# Altium PCB BSc_PCB_teikning.PcbDoc
Units mil, origin at the board's own origin, x right, y up, seen from the top; angles counter-clockwise.
Board outline 3150.59 x 3350.1 mil, 2 copper layers (Top Layer, Bottom Layer); 56 components, 51 nets, 244 pads, 90 vias.
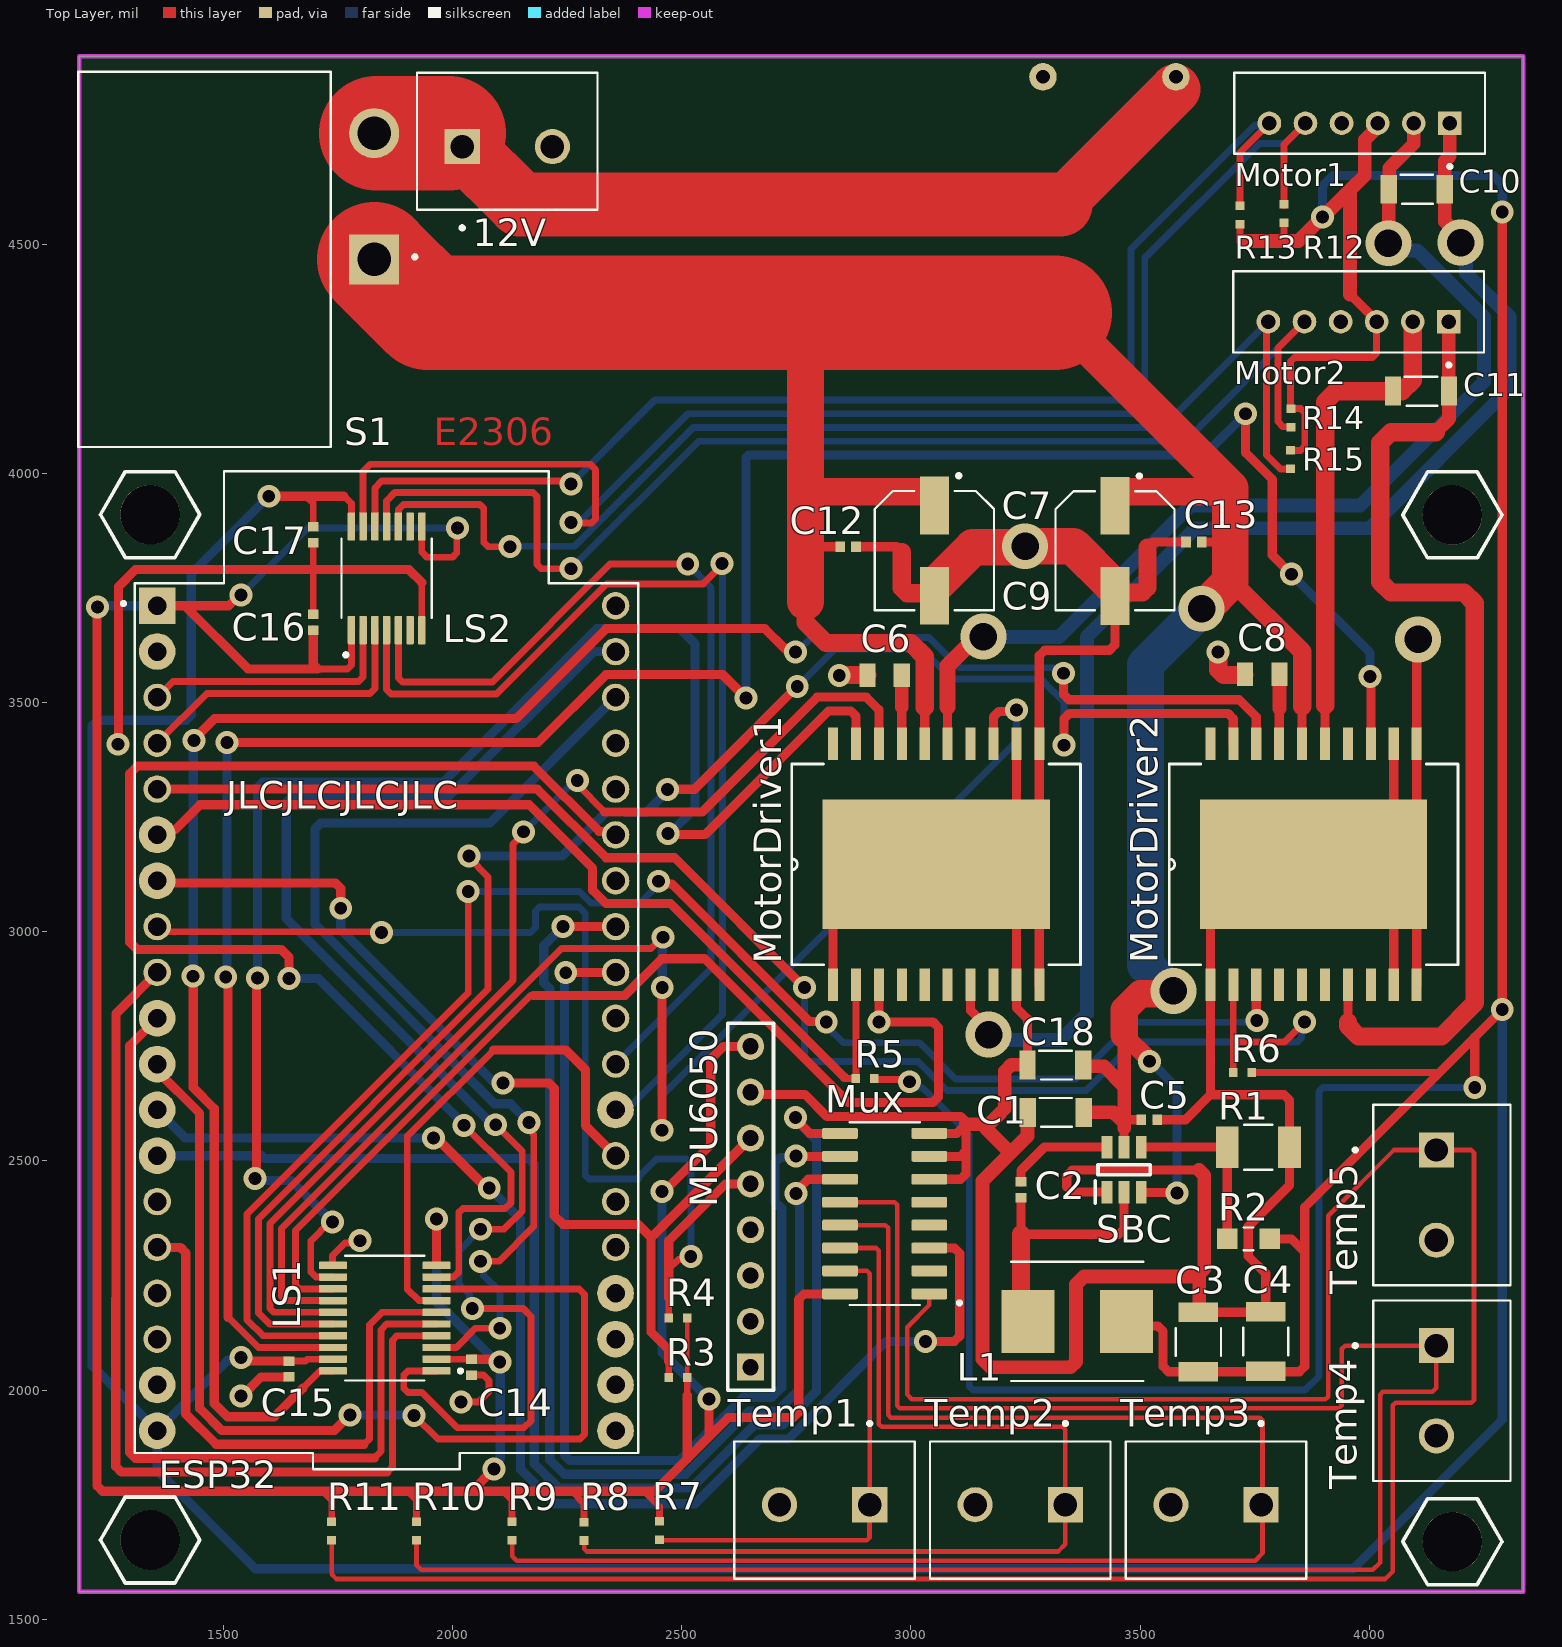
[diagram p0: Top Layer view]
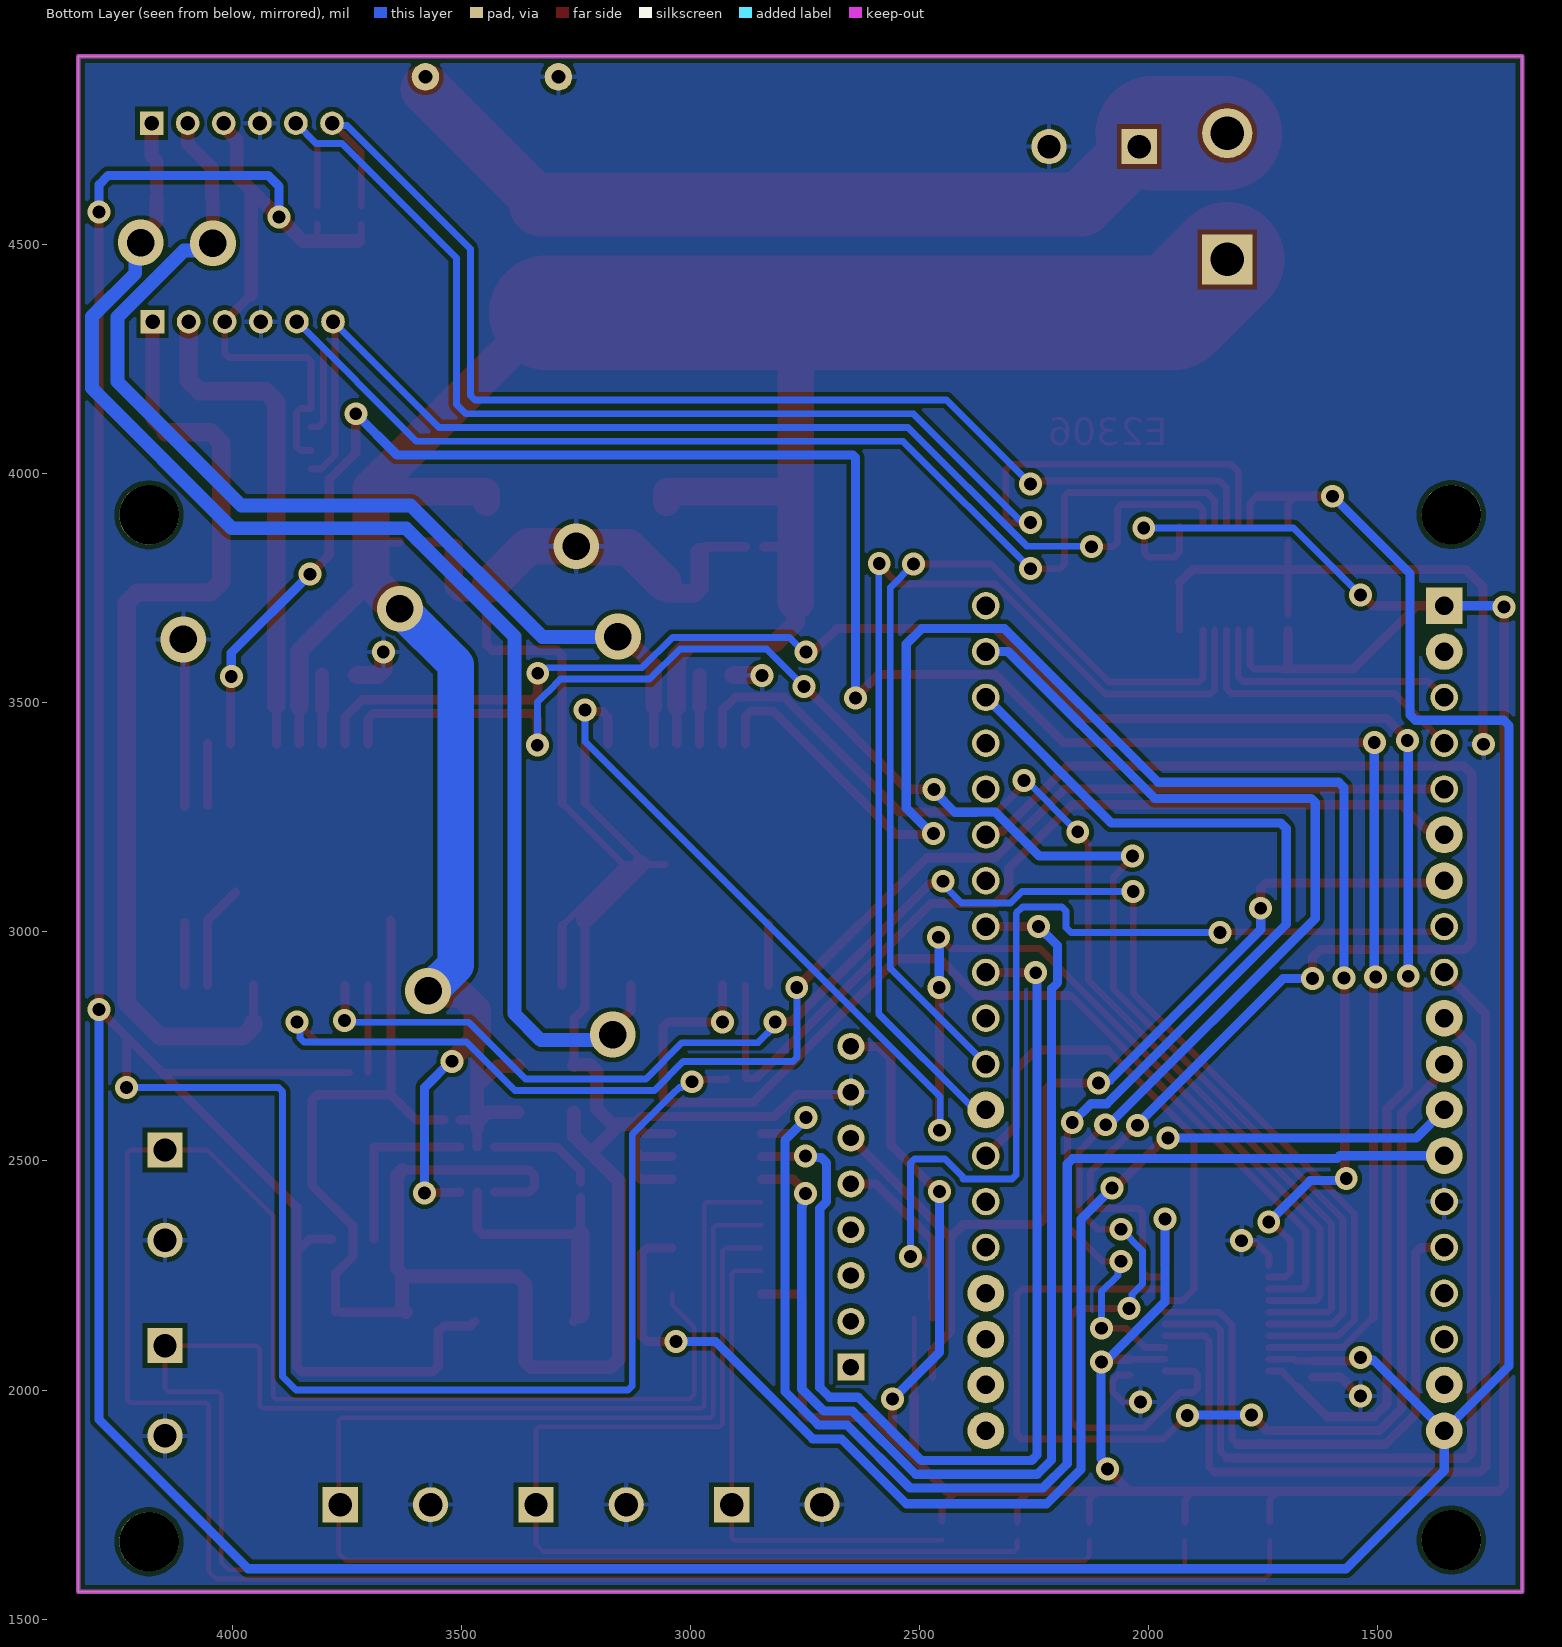
[diagram p1: Bottom Layer view, seen from below]
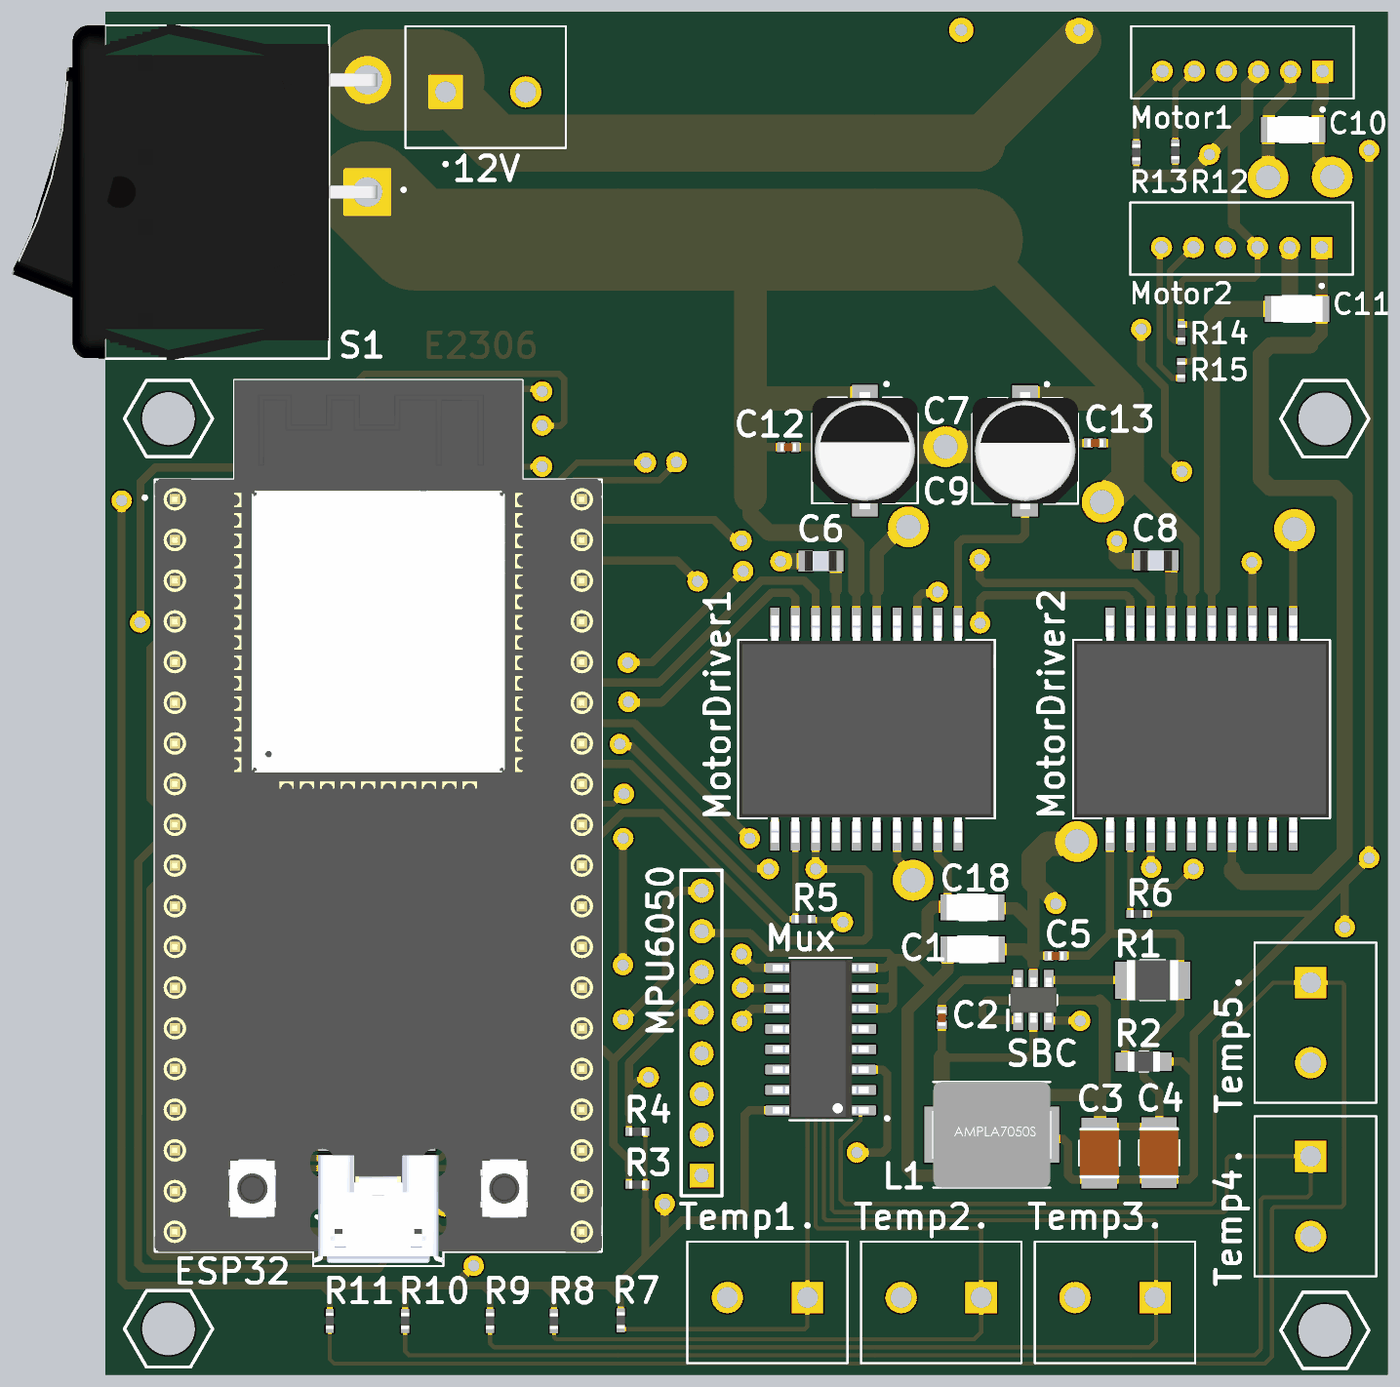
[diagram p2: 3D render of the assembled board from above, using the file's embedded part models]

## Layer stack, top to bottom
Top Solder: solder mask 0.4, Solder Resist, Dk 3.5
Top Layer: signal copper 1.4
Dielectric 1: dielectric 12.6, FR-4, Dk 4.8
Bottom Layer: signal copper 1.4
Bottom Solder: solder mask 0.4, Solder Resist, Dk 3.5

## Board outline
1185.04,1560 1185.04,4910 3570,4910 3569.16,4910.1 4335.63,4910.1 4335.63,1560.04 4335.59,1560

## Design rules (kind name [scope] priority, off if disabled: settings)
Clearance [All] p1: gap=10 ignorepadtopadclearanceinfootprint=FALSE except(0: Arc-Hole Track-Hole SMDPad-Hole THPad-Hole Via-Hole Fill-Hole Poly-Hole Region-Hole Text-Hole)
PolygonConnect [All] p1: connectstyle=Relief reliefconductorwidth=10 reliefentries=4 polygonreliefangle="90 Angle" airgapwidth=10
RoutingVias [All] p1: holewidth=28 width=50 viastyle="Through Hole" minholewidth=28 minwidth=50 maxholewidth=80 maxwidth=100
SolderMaskExpansion [All] p1: expansion=4 istentingtop=FALSE
Width [All] p1: maxlimit=500 minlimit=10 preferedwidth=10 minimp=50.000000 maximp=50.000000 favimp=50.000000
30 further rules are at their usual default settings.

## Classes and differential pairs
component class BSc_skjemateikning: 12V C1 C2 C3 C4 C5 C6 C7 C8 C9 C10 C11 C12 C13 C14 C15 C16 C17 C18 ESP32 L1 LS1 LS2 Motor1 Motor2 MotorDriver1 MotorDriver2 MPU6050 Mux R1 R2 R3 R4 R5 R6 R7 R8 R9 R10 R11 R12 R13 R14 R15 S1 SBC Temp1 Temp2 Temp3 Temp4 Temp5

## Components (designator, comment, footprint, x,y, rotation, side; value= is the part's Value field where it differs from the comment)
12V "TB002-500-02BE" CUI_TB002-500-02BE 2020.87,4712.83 r0 top
C1 "885012208094" WCAP-CSGP_885012208094 3316,2606 r0 top
C2 "CGA2B3X7R1E104K050BB" CAPC1005X55N 3240,2437.2 r270 top
C3 "CGA6P3X7R1E226M250AE" CAP_CGA6P3X7R1E226M250AE 3627,2105 r270 top
C4 "CGA6P3X7R1E226M250AE" CAP_CGA6P3X7R1E226M250AE 3774,2106 r270 top
C5 "CGA2B3X7R1E104K050BB" CAPC1005X55N 3520,2590 r0 top
C6 "885012207125" WCAP-CSGP_885012207125 2942.6,3560 r0 top
C7 "EEETQV470XAP" CAP_EEETQV470XAP 3051,3831.42 r270 top
C8 "885012207125" WCAP-CSGP_885012207125 3766.38,3561.52 r0 top
C9 "EEETQV470XAP" CAP_EEETQV470XAP 3445,3831 r270 top
C10 "885012208069" WCAP-CSGP_885012208069 4103.35,4619.87 r0 top
C11 "885012208069" WCAP-CSGP_885012208069 4112.66,4179.29 r0 top
C12 "CGA2B3X7R1E104K050BB" CAPC1005X55N 2862.8,3840 r0 top
C13 "CGA2B3X7R1E104K050BB" CAPC1005X55N 3617.21,3850 r180 top
C14 "CGA2B3X7R1E104K050BB" CAPC1005X55N 2041,2050 r270 top
C15 "CGA2B3X7R1E104K050BB" CAPC1005X55N 1643,2046 r270 top
C16 "CGA2B3X7R1E104K050BB" CAPC1005X55N 1696,3675 r90 top
C17 "CGA2B3X7R1E104K050BB" CAPC1005X55N 1696,3866 r270 top
C18 "885012208094" WCAP-CSGP_885012208094 3315,2709 r0 top
ESP32 "ESP32-DEVKITC" MODULE_ESP32-DEVKITC 1855.51,2811.65 r0 top
J1 "15TSP105" SAMTEC_SO-0715-02-01-01-L 1340,3910 r0 top
J2 "15TSP105" SAMTEC_SO-0715-02-01-01-L 4181.1,3909.45 r0 top
J3 "15TSP105" SAMTEC_SO-0715-02-01-01-L 4181.1,1669.29 r180 top
J4 "15TSP105" SAMTEC_SO-0715-02-01-01-L 1340,1673 r0 top
L1 "AMPLA7050S-100MT" IND_AMPLA7050S-100MT 3362.72,2150 r0 top
LS1 "TXS0108EPWR" SOP65P640X120-20N 1852,2157 r180 top
LS2 "TXS0104EPWRG4" SOP65P640X120-14N 1856,3771 r90 top
Motor1 "" JST_B6B-PH-K-S(LF)(SN) 3978.71,4785.56 r0 top
Motor2 "" JST_B6B-PH-K-S(LF)(SN) 3976.58,4352.48 r0 top
MotorDriver1 "MC33886PVW" SOIC127P1420X340-21N 3055,3147 r90 top
MotorDriver2 "MC33886PVW" SOIC127P1420X340-21N 3878.25,3147 r90 top
MPU6050 "" HDR1X8 2650,2050 r90 top
Mux "SN74LV4051ADR" SOIC127P600X175-16N 2942.56,2385 r180 top
R1 "ERJ14NF1372U" RES_ERJ14NF1372U 3757.91,2530 r180 top
R2 "ERJP06D1003V" RES_ERJP06D1003V 3736.26,2330 r180 top
R3 "ERJ2RKF1002X" RES_ERJ2RKF1002X 2491.65,2027.56 r0 top
R4 "ERJ2RKF1002X" RES_ERJ2RKF1002X 2491.65,2157.48 r0 top
R5 "ERJ2RKF1002X" RES_ERJ2RKF1002X 2899.84,2680 r180 top
R6 "ERJ2RKF1002X" RES_ERJ2RKF1002X 3723.3,2693.03 r0 top
R7 "ERJ2RKF1002X" RES_ERJ2RKF1002X 2451,1694 r90 top
R8 "ERJ2RKF1002X" RES_ERJ2RKF1002X 2287,1692 r270 top
R9 "ERJ2RKF1002X" RES_ERJ2RKF1002X 2129.92,1692.44 r270 top
R10 "ERJ2RKF1002X" RES_ERJ2RKF1002X 1921.26,1692.44 r270 top
R11 "ERJ2RKF1002X" RES_ERJ2RKF1002X 1736.22,1692.91 r270 top
R12 "ERJ2RKF1002X" RES_ERJ2RKF1002X 3814,4567 r90 top
R13 "ERJ2RKF1002X" RES_ERJ2RKF1002X 3718,4564 r90 top
R14 "ERJ2RKF1002X" RES_ERJ2RKF1002X 3829,4121 r270 top
R15 "ERJ2RKF1002X" RES_ERJ2RKF1002X 3828,4030 r270 top
S1 "R1966ABLKBLKGR" SW_R1966ABLKBLKGR 1828.86,4466.77 r270 top
SBC "LMR51420XDDCR" SOT95P280X110-6N 3465.07,2481.08 r90 top
Temp1 "TB002-500-02BE" CUI_TB002-500-02BE 2910,1750 r180 top
Temp2 "TB002-500-02BE" CUI_TB002-500-02BE 3336.85,1750 r180 top
Temp3 "TB002-500-02BE" CUI_TB002-500-02BE 3763.85,1750 r180 top
Temp4 "TB002-500-02BE" CUI_TB002-500-02BE 4146.29,2097.02 r270 top
Temp5 "TB002-500-02BE" CUI_TB002-500-02BE 4146.29,2523.84 r270 top
? "USB Li-ion batterilader" "USB Li-ion batterilader" 3578,4865 r180 top

## Footprints (in the part's own frame and the unit in brackets; to place one, negate y for a bottom-side part, rotate by r counter-clockwise, add the part's x,y. Pads: shape width x height; smd on the part's side, far side on the other; paste and mask are expansions set on the pad)
CAP_CGA6P3X7R1E226M250AE [mm]
  rect 1.1x2.2 smd: 1(-1.65,0) 2(1.65,0)
  silkscreen extent -0.78,-1.25 0.78,1.25, body extent -1.6,-1.25 1.6,1.25, height 2.8
CAP_EEETQV470XAP [mm]
  rect 3.2x1.6 smd: 1(-2.5,0) 2(2.5,0)
  silkscreen extent -4.25,-3.3 3.3,3.3, body extent -3.65,-3.3 3.65,3.3, height 7.7
CAPC1005X55N [mm]
  rect 0.53x0.6 smd: 1(-0.437,0) 2(0.437,0)
  body extent -0.5,-0.25 0.5,0.25, height 0.55
CUI_TB002-500-02BE [mm]
  rect 1.95x1.95 hole 1.3: 1(0,0)
  round 1.95 hole 1.3: 2(5,0)
  silkscreen extent -2.5,-4.6 7.5,4.1
HDR1X8 [mm] "Connector; Header; 8 Position"
  rect 1.5x1.5 hole 0.9: 1(0,0)
  round 1.5 hole 0.9: 2(2.54,0) 3(5.08,0) 4(7.62,0) 5(10.16,0) 6(12.7,0) 7(15.24,0) 8(17.78,0)
  silkscreen extent -1.27,-1.27 19.05,1.27
IND_AMPLA7050S-100MT [mm]
  rect 2.95x3.5 smd: 1(-2.725,0) 2(2.725,0)
  silkscreen extent -3.65,-3.3 3.65,3.3, body extent -3.72,-3.3 3.72,3.3, height 4.8
JST_B6B-PH-K-S(LF)(SN) [mm]
  rect 1.308x1.308 hole 0.8: 1(5,-0.55)
  round 1.308 hole 0.8: 2(3,-0.55) 3(1,-0.55) 4(-1,-0.55) 5(-3,-0.55) 6(-5,-0.55)
  silkscreen extent -6.95,-3.05 6.95,2.25
MODULE_ESP32-DEVKITC [mil]
  rect 80x80 hole 40.16: 1(-500,899.61)
  round 80 hole 40.16: 2(-500,799.61) 6(-500,399.61) 7(-500,299.61) 10(-500,-0.39) 11(-500,-100.39) 12(-500,-200.39) 13(-500,-300.39) 18(-500,-800.39) 19(-500,-900.39) 20(500,-900.39) 21(500,-800.39) 22(500,-700.39) 23(500,-600.39) 27(500,-200.39)
  round 60 hole 40.16: 3(-500,699.61) 4(-500,599.61) 5(-500,499.61) 8(-500,199.61) 9(-500,99.61) 14(-500,-400.39) 15(-500,-500.39) 16(-500,-600.39) 17(-500,-700.39) 24(500,-500.39) 25(500,-400.39) 26(500,-300.39) 28(500,-100.39) 29(500,-0.39) 30(500,99.61) 31(500,199.61) 32(500,299.61) 33(500,399.61) 34(500,499.61) 35(500,599.61) 36(500,699.61) 37(500,799.61) 38(500,899.61)
  silkscreen extent -578,-984 549,1193, body extent -550,-976 550,1193, height 228
RES_ERJ2RKF1002X [mm]
  rect 0.475x0.5 smd: 1(-0.512,0) 2(0.512,0)
  body extent -0.5,-0.25 0.5,0.25, height 0.35
RES_ERJ14NF1372U [mm]
  rect 1.25x2.3 smd: 1(-1.725,0) 2(1.725,0)
  silkscreen extent -0.78,-1.25 0.78,1.25, body extent -1.6,-1.25 1.6,1.25, height 0.6
RES_ERJP06D1003V [mm]
  rect 1.15x1.15 smd: 1(-1.175,0) 2(1.175,0)
  silkscreen extent -0.28,-0.62 0.28,0.62, body extent -1,-0.63 1,0.63, height 0.6
SAMTEC_SO-0715-02-01-01-L [mm]
  round 3.3 hole 3.3 unplated: ""(0,0)
  silkscreen extent -2.75,-2.38 2.75,2.38
SOIC127P600X175-16N [mm]
  rrect25% 1.97x0.6 smd: 1(-2.475,4.445) 2(-2.475,3.175) 3(-2.475,1.905) 4(-2.475,0.635) 5(-2.475,-0.635) 6(-2.475,-1.905) 7(-2.475,-3.175) 8(-2.475,-4.445) 9(2.475,-4.445) 10(2.475,-3.175) 11(2.475,-1.905) 12(2.475,-0.635) 13(2.475,0.635) 14(2.475,1.905) 15(2.475,3.175) 16(2.475,4.445)
  silkscreen extent -4.25,-5.07 1.95,5.07, body extent -3,-4.95 3,4.95, height 1.75
SOIC127P1420X340-21N [mil]
  rect 71x22 smd: 1(-263,225) 2(-263,175) 3(-263,125) 4(-263,75) 5(-263,25) 6(-263,-25) 7(-263,-75) 8(-263,-125) 9(-263,-175) 10(-263,-225) 11(263,-225) 12(263,-175) 13(263,-125) 14(263,-75) 15(263,-25) 16(263,25) 17(263,75) 18(263,125) 19(263,175) 20(263,225)
  rect 283x496 smd: 21(0,0)
  silkscreen extent -219,-315 219,315, body extent -280,-313 280,313, height 134
SOP65P640X120-14N [mm]
  rrect25% 1.57x0.41 smd: 1(-2.87,1.95) 2(-2.87,1.3) 3(-2.87,0.65) 4(-2.87,0) 5(-2.87,-0.65) 6(-2.87,-1.3) 7(-2.87,-1.95) 8(2.87,-1.95) 9(2.87,-1.3) 10(2.87,-0.65) 11(2.87,0) 12(2.87,0.65) 13(2.87,1.3) 14(2.87,1.95)
  silkscreen extent -4.34,-2.5 2.2,2.5, body extent -3.2,-2.5 3.2,2.5, height 1.2
SOP65P640X120-20N [mm]
  rrect25% 1.57x0.41 smd: 1(-2.87,2.925) 2(-2.87,2.275) 3(-2.87,1.625) 4(-2.87,0.975) 5(-2.87,0.325) 6(-2.87,-0.325) 7(-2.87,-0.975) 8(-2.87,-1.625) 9(-2.87,-2.275) 10(-2.87,-2.925) 11(2.87,-2.925) 12(2.87,-2.275) 13(2.87,-1.625) 14(2.87,-0.975) 15(2.87,-0.325) 16(2.87,0.325) 17(2.87,0.975) 18(2.87,1.625) 19(2.87,2.275) 20(2.87,2.925)
  silkscreen extent -4.29,-3.45 2.2,3.45, body extent -3.2,-3.25 3.2,3.25, height 1.2
SOT95P280X110-6N [mm]
  rect 1.25x0.6 smd: 1(-1.25,0.95) 2(-1.25,0) 3(-1.25,-0.95) 4(1.25,-0.95) 5(1.25,0) 6(1.25,0.95)
  silkscreen extent -1.88,-1.45 0.28,1.6, body extent -1.4,-1.45 1.4,1.45, height 0.97
SW_R1966ABLKBLKGR [mm]
  rect 2.775x2.775 hole 1.85: 1(0,0)
  round 2.775 hole 1.85: 1A(-7,0)
  silkscreen extent -10.4,-16.4 10.4,2.35, body extent -10.47,-22.2 10.47,0.6, height 14.8
"USB Li-ion batterilader" [mil]
  round 60 hole 30: 1(0,0) 2(290,0)
  body extent -100,-40 1235,810, height 197
WCAP-CSGP_885012207125 [mm]
  rect 0.9x1.3 smd: 1(-0.95,0) 2(0.95,0)
  body extent -1,-0.63 1,0.63, height 0.63
WCAP-CSGP_885012208069 [mm]
  rect 0.9x1.6 smd: 1(-1.55,0) 2(1.55,0)
  silkscreen extent -0.9,-0.8 0.9,0.8, body extent -1.6,-0.8 1.6,0.8, height 1.25
WCAP-CSGP_885012208094 [mm]
  rect 0.9x1.6 smd: 1(-1.55,0) 2(1.55,0)
  silkscreen extent -0.9,-0.8 0.9,0.8, body extent -1.6,-0.8 1.6,0.8, height 1.25

## Part data
12V C3 C4 C7 C9 ESP32 L1 LS1 LS2 Mux R1 R2 R3 R4 R5 R6 R7 R8 R9 R10 R11 R12 R13 R14 R15 S1 Temp1 Temp2 Temp3 Temp4 Temp5: Package=None, Availability=Unavailable, Price=None
  12V Temp1 Temp2 Temp3 Temp4 Temp5: MF="{'manufacturer': u'CUI Devices'}", MP=TB002-500-02BE
  C3 C4: MF="{'manufacturer': u'TDK Corporation'}", MP=CGA6P3X7R1E226M250AE
  C7 C9: MF="{'manufacturer': u'Panasonic'}", MP=EEETQV470XAP
  ESP32: MF="{'manufacturer': u'Olimex LTD'}", MP=ESP32-DEVKITC
  L1: MF="{'manufacturer': u'Abracon Corporation'}", MP=AMPLA7050S-100MT
  LS1: MF="{'manufacturer': u'Texas Instruments'}", MP=TXS0108EPWR
  LS2: MF="{'manufacturer': u'Texas Instruments'}", MP=TXS0104EPWRG4
  Mux: MF="{'manufacturer': u'Texas Instruments'}", MP=SN74LV4051ADR
  R1: MF="{'manufacturer': u'Panasonic'}", MP=ERJ14NF1372U
  R2: MF="{'manufacturer': u'Panasonic'}", MP=ERJP06D1003V
  R3 R4 R5 R6 R7 R8 R9 R10 R11 R12 R13 R14 R15: MF="{'manufacturer': u'Panasonic'}", MP=ERJ2RKF1002X
  S1: MF="{'manufacturer': u'E-Switch'}", MP=R1966ABLKBLKGR
C1 C10 C11 C18: "<b> WCAP-CSGP Ceramic Capacitors <br> <br> <br><b>Characteristics </b><br> </b><br>Multilayer Ceramic Chip Capacitor <br>Recommended soldering:Reflow, for 0603 and 0805 wave soldering is also allowed <br>Operating temperature:-55 Â°C to +125 Â°C; <br>Ceramic characteristics: Class I - NPO ; Class II -X7R, X5R <br>High performance ceramic <br>High capacitance stability <br>Minimal aging  <br>Termination:Cu/Ni/Sn <br>   <br><a href=\"http://katalog.we-online.de/media/images/eisos/WCAP-CSGP_pf2.jpg\" title=\"Enlarge picture\"> <img src=\"http://katalog.we-online.de/media/thumbs2/eisos/thb_WCAP-CSGP_pf2.jpg\" width=\"320\"></a><p> Details see: <a href=\"http://katalog.we-online.de/en/pbs/WCAP-CSGP-1206?\">http://katalog.we-online.de/en/pbs/WCAP-CSGP-1206? </a><p>Created:  2015-01-28 <br>2015 (C) Wurth Elektronik", Package=None, Availability=Unavailable, MF="{'manufacturer': u'Wurth Electronics Inc'}", Price=None
  C1 C18: MP=885012208094
  C10 C11: MP=885012208069
C2 C5 C12 C13 C14 C15 C16 C17: "0.1 ÂµF Â±10% 25V Ceramic Capacitor X7R 0402 (1005 Metric)", Package=None, Availability=Unavailable, MF="{'manufacturer': u'TDK Electronics'}", MP=CGA2B3X7R1E104K050BB, Price=None
C6 C8: "<b> WCAP-CSGP Ceramic Capacitors <br> <br> <br><b>Characteristics </b><br> </b><br>Multilayer Ceramic Chip Capacitor <br>Recommended soldering:Reflow, for 0603 and 0805 wave soldering is also allowed <br>Operating temperature:-55 Â°C to +125 Â°C; <br>Ceramic characteristics: Class I - NPO ; Class II -X7R, X5R <br>High performance ceramic <br>High capacitance stability <br>Minimal aging  <br>Termination:Cu/Ni/Sn <br>   <br><a href=\"http://katalog.we-online.de/media/images/eisos/WCAP-CSGP_pf2.jpg\" title=\"Enlarge picture\"> <img src=\"http://katalog.we-online.de/media/thumbs2/eisos/thb_WCAP-CSGP_pf2.jpg\" width=\"320\"></a><p> Details see: <a href=\"http://katalog.we-online.de/en/pbs/WCAP-CSGP-0805?\">http://katalog.we-online.de/en/pbs/WCAP-CSGP-0805? </a><p>Created:  2015-01-28 <br>2015 (C) Wurth Elektronik", Package=None, Availability=Unavailable, MF="{'manufacturer': u'Wurth Electronics Inc'}", MP=885012207125, Price=None
J1 J2 J3 J4: library part SO-0715-02-01-01-L, Package=None, Availability=Unavailable, MF="{'manufacturer': u'Samtec'}", MP=SO-0715-02-01-01-L, Price=None
Motor1 Motor2: library part B6B-PH-K-S(LF)(SN), Package=None, Availability=Unavailable, MF="{'manufacturer': u'JST'}", MP=B6B-PH-K-S(LF)(SN), Price=None
MotorDriver1 MotorDriver2: "H-Bridge", Package=None, Availability=Unavailable, MF="{'manufacturer': u'NXP USA'}", MP=MC33886PVW, Price=None
MPU6050: library part "Header 8", "Header, 8-Pin", LatestRevisionDate=17-Jul-2002, LatestRevisionNote="Re-released for DXP Platform.", Publisher="Altium Limited"
SBC: "Integrated Circuit", Manufacturer_Name="Texas Instruments", Mouser Part Number=595-LMR51420XDDCR, Arrow Part Number=LMR51420XDDCR, Arrow Price/Stock=https://www.arrow.com/en/products/lmr51420xddcr/texas-instruments?region=nac, Datasheet Link=https://www.ti.com/lit/ds/symlink/lmr51420.pdf?ts=1663231243064, Height=1.1mm, Manufacturer_Part_Number=LMR51420XDDCR, Mouser Price/Stock=https://www.mouser.co.uk/ProductDetail/Texas-Instruments/LMR51420XDDCR?qs=vvQtp7zwQdN6fBqQU4azxw%3D%3D

## Via types
v1: diameter 50, hole 28, Top Layer to Bottom Layer, 70 vias
v2: diameter 50/50 (per signal layer), hole 28, Top Layer to Bottom Layer, 12 vias
v3: diameter 100, hole 60, Top Layer to Bottom Layer, 8 vias

## Nets (pads, with @x,y where several pads share a name; then routed paths per layer and width w, separated by ;. In a path a pad name is that pad's centre, name@x,y a point inside that pad or via, vN(x,y) a via of type N, cw(c..) or ccw(c..) an arc to the next point about the centre after c; other vN are vias at no path point)
3.3V: C14.1 C16.1 ESP32.1 LS1.2 LS1.10 LS2.1 LS2.8 MPU6050.8 Mux.16 R3.2 R4.2 R7.2 R8.1 R9.1 R10.1 R11.1 | length 8131.3
  Top Layer w10: R3.2 R4.2
  Top Layer w15: 1705.79,3573.5 1770.44,3573.5 1779.23,3582.29 LS2.1 ; 1716.54,1779.53 1736.22,1759.84 R11.1 ; 1901.57,1779.53 1921.26,1759.84 R10.1 ; LS2.8 1932.77,3828.23 1944,3817 2000.21,3817 2009,3825.79 2009,3879 v1(2011,3881) ; LS1.2 2040.77,2067.43 C14.1 ; 2110.24,1779.53 2129.92,1759.84 R9.1 ; 2260,1779.53 2287,1752.53 R8.1 ; 2418,1779.53 2451,1746.53 R7.2 ; 2511.81,1988.19 R3.2
  Top Layer w20: v1(1225.04,3708.66) 1224.41,3708.03 1224.41,1791.24 1236.13,1779.53 1716.54,1779.53 1901.57,1779.53 2041.53,1779.53 ; ESP32.1@1352.91,3708.66 ESP32.1 1415.74,3711.26 ; v1(1538,3735) 1535.02,3735 1511.28,3711.26 1415.74,3711.26 ; C16.1 1696,3583.29 1705.79,3573.5 1553.5,3573.5 1415.74,3711.26 ; v1(1965,2373) 1965,2275.39 LS1.10@1965.47,2274.92 ; C14.1 2088.68,2067.2 2094.88,2061 v1(2103,2061) ; v1(2090,1828) 2041.53,1779.53 ; v1(2456.69,2433.07) 2460.63,2433.07 2562.99,2535.43 2562.99,2722.28 2590.47,2749.76 2649.76,2749.76 MPU6050.8 ; 2511.81,1988.19 2511.81,1850.39 ; v1(2559.06,1980.32) 2559.06,1897.64 ; Mux.16 2766.97,2210 2755.25,2198.28 2755.25,1951.72 2743.53,1940 2601.42,1940 2559.06,1897.64 ; 2041.53,1779.53 2110.24,1779.53 2260,1779.53 2418,1779.53 2440.94,1779.53 2511.81,1850.39 ; 2511.81,1850.39 2559.06,1897.64
  Bottom Layer w15: v1(1538,3735) 1684,3881 v1(2011,3881)
  Bottom Layer w20: v1(1225.04,3708.66) 1227.64,3711.26 ESP32.1 ; v1(1965,2373) 1965,2192.36 2096.36,2061 v1(2103,2061) ; v1(2090,1828) 2090,1836.12 2104,1850.12 v1@2104,2060 ; v1(2456.69,2433.07) 2456.69,2082.68 v1(2559.06,1980.32)
B1: LS1.20 MotorDriver2.18 | length 4390.6
  Top Layer w15: 1673,2004 1710.84,2041.84 LS1.20
  Top Layer w20: v1(1434,2903) 1434,2660.05 1480,2614.05 1480,1970.85 1508.85,1942 1611,1942 1673,2004 ; v1(1436,3417) 1436,3420.52 1480.48,3465 2138.54,3465 2334.8,3661.26 2681.06,3661.26 2726.34,3615.98 2742.29,3615.98 v1(2748.03,3610.24) ; v1(3333,3564) 3333,3517.99 3344.72,3506.27 3715.81,3506.27 3753.25,3468.82 MotorDriver2.18
  Bottom Layer w15: v1(2748.03,3610.24) 2751.68,3610.24 2783.44,3642 3039.1,3642 3105.1,3576 3311.53,3576 3323.53,3564 v1(3333,3564)
  Bottom Layer w20: v1(1434,2903) 1434,3415 v1(1436,3417)
B2: LS1.18 MotorDriver2.13 | length 5215.2
  Top Layer w15: 1510,2159.1 1576.08,2093.02 LS1.18
  Top Layer w20: v1(1505,2901) 1510,2896 1510,2159.1 ; v1(1508,3413) 2186.54,3413 2334.8,3561.26 2588.74,3561.26 v1(2640,3510) ; v2(3730,4130) 3730,4045 3788,3987 3788,3822 v2(3830,3780) ; v1(4001.61,3557.02) 4003.33,3555.29 MotorDriver2.13@4003.33,3410.08
  Bottom Layer w20: v1(1505,2901) 1508,2904 v1(1508,3413) ; v1(2640,3510) 2640,4034.14 2645.86,4040 3640,4040 v2(3730,4130) ; v2(3830,3780) 4001.61,3608.39 v1(4001.61,3557.02)
B3: LS1.17 MotorDriver2.3 | length 3404
  Top Layer w15: LS1.17 1585.85,2118.61 1551.5,2152.96 1551.5,2383.92 2034,2866.42 v1(2034,3088)
  Top Layer w20: v2(2448.82,3110.24) 2454.56,3104.5 2478.18,3104.5 2778.42,2804.26 2813.98,2804.26 v2(2815.09,2803.15) ; v2@3753.25,2807.5 MotorDriver2.3
  Bottom Layer w15: v1(2034,3088) 2277,3088 2302,3063 2409,3063 2448.82,3102.82 v2(2448.82,3110.24) ; v2(2815.09,2803.15) 2815.09,2794.91 2852.13,2757.87 3018.13,2757.87 3097,2679 3360.1,2679 3483.56,2802.46 3750.65,2802.46 v2(3754.47,2806.28)
B4: LS1.16 MotorDriver2.19 | length 3524.1
  Top Layer w15: LS1.16 1600.52,2144.2 1576.5,2168.23 1576.5,2373.56 2077.5,2874.56 2077.5,3119.6 2035.43,3161.67 v1(2035.43,3165.35)
  Top Layer w20: v1(2468.5,3310) 2469.53,3311.02 2527.8,3311.02 v1(2751.97,3535.2) ; v1@3339.74,3412.74 v1(3334,3407) 3334,3464.56 3345.72,3476.27 3691.54,3476.27 3703.25,3464.56 MotorDriver2.19
  Bottom Layer w15: v1(2751.97,3535.2) 2833.77,3617 3023,3617 3089,3551 3283.27,3551 3310.96,3523.31 3311.69,3523.31 3334,3501 v1(3334,3407)
  Bottom Layer w20: v1(2035.43,3165.35) 2238.9,3165.35 2334.8,3261.26 2376.22,3261.26 2376.78,3260.7 2422.98,3260.7 2468.5,3306.22 v1(2468.5,3310)
B5: LS1.15 MotorDriver1.18 | length 2454.5
  Top Layer w15: LS1.15 1610.29,2169.8 1601.5,2178.58 1601.5,2363.21 2132,2893.71 2132,3191.71 2155,3214.71 v1(2155,3218) ; v1(2272.06,3330.06) 2272.06,3320.94 2331.74,3261.26
  Top Layer w20: 2331.74,3261.26 2544.72,3261.26 2795.28,3511.81 2902.33,3511.81 2930,3484.14 MotorDriver1.18
  Bottom Layer w15: v1(2155,3218) 2267.06,3330.06 v1(2272.06,3330.06)
B6: LS1.14 MotorDriver1.13 | length 3136.3
  Top Layer w15: LS1.14 1635.29,2195.39 1626.5,2204.17 1626.5,2352.85 2237.41,2963.76 2432.71,2963.76 2456.95,2988 v1(2459,2988)
  Top Layer w20: v1(2456.69,2566.93) 2456.69,2878.09 v1(2457.3,2878.7) ; MotorDriver1.13 3180,3468.78 3191.72,3480.5 3226.5,3480.5 v1(3230,3484)
  Bottom Layer w10: v1@2455,2568.62 v1(2456.69,2566.93)
  Bottom Layer w15: v1@2455,2568.62 2455,2640.04 3230,3415.04 v1(3230,3484)
  Bottom Layer w20: v1(2457.3,2878.7) 2457.3,2986.3 v1(2459,2988)
B7: LS1.13 MotorDriver1.3 | length 2354.5
  Top Layer w15: LS1.13 1665.79,2220.98 1657,2229.76 1657,2347.99 2170.27,2861.26 2176.15,2861.26
  Top Layer w20: 2176.15,2861.26 2376.22,2861.26 2455.96,2941 2549.8,2941 2863.1,2627.7 3048.15,2627.7 3059.86,2639.42 3059.86,2791.42 3048.15,2803.14 v2(2930.09,2803.14) 2930.09,2883.91 MotorDriver1.3
B8: LS1.12 MotorDriver1.19 | length 3388.5
  Top Layer w15: v1(1738.23,2366.77) 1731.77,2366.77 1690.6,2325.6 1690.6,2258.02 1702.04,2246.59 LS1.12
  Top Layer w20: v1(1569.2,2461.72) 1572.46,2464.98 1572.46,2897.46 v1(1574,2899) ; v1(2470,3214) 2472,3212 2550.58,3212 2820.39,3481.81 2868.28,3481.81 2880,3470.1 MotorDriver1.19
  Bottom Layer w20: v1(1569.2,2461.72) 1573.91,2457 1648,2457 v1(1738.23,2366.77) ; v1(1574,2899) 1574,3314.28 1585.72,3326 1979.57,3326 2314.83,3661.26 2495.56,3661.26 2529,3627.82 2529,3270 2473,3214 v1(2470,3214)
D1: ESP32.37 LS1.1 | length 3062.3
  Top Layer w15: LS1.1 1902.29,2041.84 1893.5,2033.06 1893.5,2003.79 1902.29,1995 1933,1995 2010,1918 2156,1918 2171,1933 2171,2161.13 2154.13,2178 v1(2043,2178) ; v1(2061,2351) 2112,2351 2152,2391 2152,2521 v1(2094,2579)
  Bottom Layer w15: v1(2043,2178) 2036.91,2184.09 2036.91,2209.09 2014,2232 2014,2304 v1(2061,2351)
  Bottom Layer w20: v1(2094,2579) 2087,2579 1637,3029 1637,3282.21 1645.79,3291 1987,3291 2307.26,3611.26 ESP32.37
D2: ESP32.36 LS1.3 | length 2328.2
  Top Layer w15: LS1.3 2008.02,2093.02 2050,2135 v1(2103,2135) ; v1(2061,2281) 2101,2281 2177,2357 2177,2558.12 2173.7,2561.42 2173.7,2577.3 v1(2167,2584)
  Top Layer w20: ESP32.36 ESP32.36@2356.77,3510
  Bottom Layer w15: v1(2061,2281) 2067.59,2274.41 2067.59,2250.41 2103,2215 v1(2103,2135)
  Bottom Layer w20: v1(2167,2584) 2126.13,2624.87 2091.37,2624.87 1700,3016.24 1700,3225.28 1711.72,3237 2081.25,3237 ESP32.36
D3: ESP32.15 LS1.6 | length 1258.2
  Top Layer w15: 1806.79,1882 1818.5,1893.71 1818.5,2142.5 1845.8,2169.8 LS1.6
  Top Layer w20: ESP32.15 1406.28,2311.26 1418,2299.54 1418,1948 1484,1882 1806.79,1882
D4: ESP32.26 LS1.7 | length 1106.9
  Top Layer w15: LS1.7 1926.18,2195.41 1901,2220.58 1901,2553.1 2089.9,2742
  Top Layer w20: 2089.9,2742 2247,2742 2290,2699 2290,2576.77 ESP32.26
FS1: ESP32.5 MotorDriver2.2 R6.1 | length 3307.3
  Top Layer w15: R6.1 3703.14,2759.84 ; MotorDriver2.2 3703.14,2883.89 3703.14,2759.84 ; v2(3858.27,2803.15) 3814.96,2759.84 3703.14,2759.84
  Top Layer w20: ESP32.5 2184.8,3311.26 2334.8,3161.26 2484.41,3161.26 2767.39,2878.28 v2(2768.04,2878.28)
  Bottom Layer w15: v2(2768.04,2878.28) 2767.72,2877.95 2767.72,2725.32 2776.5,2716.54 3015.75,2716.54 3078.28,2654 3382.35,2654 3488.19,2759.84 3842.89,2759.84 3851.68,2768.63 3851.68,2796.56 v2(3858.27,2803.15)
FS2: ESP32.6 MotorDriver1.2 R5.2 | length 2032.5
  Top Layer w15: 2854.26,2682.5 2853.23,2681.46 2854.69,2680 R5.2 ; R5.2@2880,2680.32 MotorDriver1.2
  Top Layer w20: ESP32.6 1366.99,3222.74 1394.97,3222.74 1449.23,3277 2167,3277 2305.51,3138.49 2305.51,3090.55 2334.8,3061.26 2475.5,3061.26 2854.26,2682.5
GND: 12V.2 ?.2 C1.1 C3.1 C4.1 C5.2 C6.1 C7.2 C8.1 C9.2 C12.2 C13.2 C14.2 C15.2 C16.2 C17.2 C18.1 ESP32.14 LS1.11 LS2.7 Motor1.4 Motor2.4 MotorDriver1.1 MotorDriver1.9 MotorDriver1.10 MotorDriver1.11 MotorDriver1.12 MotorDriver1.21 MotorDriver2.1 MotorDriver2.9 MotorDriver2.10 MotorDriver2.11 MotorDriver2.12 MotorDriver2.21 MPU6050.7 Mux.6 Mux.7 Mux.8 R1.1 SBC.1 Temp1.2 Temp2.2 Temp3.2 Temp4.2 Temp5.2 | length 10300.2
  Top Layer w15: v1(1270,3409) v1@1271,3410 ; C16.2@1696,3693.41 1696,3781 C17.2 ; LS1.11 1738.51,2272.16 1737.94,2272.73 1737.94,2293.94 1765.3,2321.3 1793.3,2321.3 v1(1798,2326) ; LS2.7 1932.77,3762.23 ; v1(2018,1974) 2056.21,1974 2079,1996.79 2079,2020.9 2067.1,2032.8 C14.2 ; MotorDriver1.21 MotorDriver1.21@3096,3147 ; MotorDriver1.21@3230,3281 MotorDriver1.21@3096,3147 ; MotorDriver1.21@3279.83,3013 MotorDriver1.21@3145.83,3147 ; MotorDriver1.21@3280,3281 3146,3147 MotorDriver1.21@3145.83,3147 ; MotorDriver1.21@3096,3147 3108.5,3147 MotorDriver1.21@3145.83,3147
  Top Layer w20: v1@1271,3410 1271,3753 1308,3790 1696,3790 1905,3790 1932.77,3762.23 ; v1(1538,1987) 1540.64,1987 1582.43,2028.8 C15.2 ; MPU6050.7 2654.77,2645.23 2768.16,2645.23 2816.56,2596.83 3108.28,2596.83 3120,2585.11 3120,2580 ; MotorDriver1.1 2830,3016.79 MotorDriver1.21@2830.8,3017.59 ; C12.2 2968.28,3840 2980,3828.28 ; Mux.6 3108.28,2460 3120,2471.72 3120,2521.72 ; Mux.7 3108.28,2510 3120,2521.72 ; Mux.8 3100,2560 3120,2580 ; C7.2@3049.62,3738.6 C7.2@3051.18,3740.16 ; 3196.55,2606 3204.55,2614 ; MotorDriver1.21@3230,3025.5 MotorDriver1.9 3230,2834.05 3253.98,2810.08 C18.1 ; MotorDriver1.21@3230,3281 MotorDriver1.12 ; MotorDriver1.10@3279.83,2884.17 MotorDriver1.21@3279.83,3013 ; MotorDriver1.21@3280,3281 MotorDriver1.11 3280,3602.46 3291.72,3614.17 3433.17,3614.17 3444.88,3625.89 C9.2@3444.88,3740.16 ; SBC.1 3351.72,2431.87 3340,2443.58 3340,2468.28 3351.72,2480 3628.28,2480 ; 3516.07,3838.28 3527.78,3850 C13.2 ; C5.2 3598.84,2590 3653.25,2644.42 ; C3.1@3620,2170 C4.1@3760,2170 ; MotorDriver2.21@3654.2,3025.04 3653.25,3024.09 MotorDriver2.1 3653.25,2644.42 ; C8.1@3727.45,3560 C8.1 ; C4.1 3774,2254.28 3735.89,2292.39 3735.89,2356.93 3825.83,2446.87 R1.1 3825.83,2632.7 3814.11,2644.42 3653.25,2644.42 ; MotorDriver2.21@3992.5,3086.25 4053.25,3025.5 MotorDriver2.9 ; MotorDriver2.21@4053.05,3276.47 4053.25,3276.67 MotorDriver2.12 ; MotorDriver2.10 4103.25,3019.45 MotorDriver2.21@4103.29,3019.48 ; MotorDriver2.21@4103.35,3273.49 4103.25,3273.58 MotorDriver2.11 4103.25,3634.75 v3(4106.3,3637.8) ; 3120,2521.72 3120,2580
  Top Layer w30: 3120,2580 3170.55,2580 3196.55,2606 ; 3162.78,2572.22 3217.5,2517.5 ; 3204.55,2614 3204.55,2695.55 3219,2710 3252.98,2710 C18.1 ; C1.1 3254.06,2605.09 3254.06,2554.06 3217.5,2517.5 ; C3.1@3620,2170 3622.39,2170 3629,2176.61 3629,2253.86 ; 3628.28,2480 3640,2468.28 3640,2264.86 3623.14,2248 3377.57,2248 3360,2230.43 3360,2061.72 3348.28,2050 3173.57,2050 3156,2067.57 3156,2456 3217.5,2517.5
  Top Layer w40: v1(2843.52,3559.07) 2844.44,3560 C6.1 ; 2980,3828.28 2980,3750.31 2991.72,3738.6 C7.2@3049.62,3738.6 ; MotorDriver1.21@3108.5,3147 MotorDriver1.21@3230,3025.5 ; C9.2@3444.88,3740.16 3504.35,3740.16 3516.07,3751.87 3516.07,3838.28 ; v2(3670,3610) 3670,3571.72 3681.72,3560 C8.1@3727.45,3560
  Top Layer w80: C7.2@3059.69,3763.15 3135.12,3838.58 3246.58,3838.58 v3(3249,3841) 3353.95,3841 C9.2@3436.38,3758.58
IN1: ESP32.9 LS1.4 | length 2105.1
  Top Layer w15: 1265,2200.2 1265.51,2200.72 ; 1857,1821 1868.5,1832.5 1868.5,2108.33 1878.79,2118.61 LS1.4
  Top Layer w20: 1265,2200.2 1265,1833.72 1277.72,1821 1857,1821 ; 1265.51,2200.72 1265.51,2821.26 ESP32.9
IN2: ESP32.10 LS1.5 | length 1923.6
  Top Layer w15: 1829,1852 1843.5,1866.5 1843.5,2131.5 1856.2,2144.2 LS1.5
  Top Layer w20: ESP32.10 1295.51,2751.26 1295.51,1863.72 1307.97,1851.26 1380.36,1851.26 1381.1,1852 1829,1852
IN3: ESP32.11 LS1.8 | length 2323.5
  Top Layer w15: v1(1915.95,1944.95) 1916.05,1944.95 1968,1893 2278.21,1893 2288,1902.79 2288,2209 2276.18,2220.82 2076.82,2220.82 2076.67,2220.98 LS1.8
  Top Layer w20: ESP32.11 1355.51,2696.11 1448,2603.62 1448,1960.43 1496.43,1912 1742,1912 v1(1776,1946)
  Bottom Layer w20: v1(1776,1946) 1914.9,1946 v1(1915.95,1944.95)
IN4: ESP32.33 LS1.9 | length 2946.6
  Top Layer w15: LS1.9 2001.96,2246.59 2013.4,2258.02 2013.4,2387.21 2022.18,2396 2114.43,2396 2127,2408.57 2127,2475.36 v1(2024.68,2577.68)
  Top Layer w20: v1(1643,2898) 1643,2944.28 1626.02,2961.26 1311.74,2961.26 1295.51,2977.49 1295.51,3344.51 1312.26,3361.26 2177.23,3361.26 2319.57,3218.91 2347.86,3218.91 ESP32.33 ESP32.33@2363.17,3203.61
  Bottom Layer w20: v1(1643,2898) 1707,2898 2024.68,2580.32 v1(2024.68,2577.68)
Motor1ChA: ESP32.3 LS2.2 | length 570
  Top Layer w15: ESP32.3 1390.25,3546 1795,3546 1804.82,3555.82 LS2.2
Motor1ChA_5V: LS2.13 Motor1.5 R12.2 | length 3153.9
  Top Layer w15: LS2.13 1804.82,4003.82 1821,4020 2300,4020 2312,4008 2312,3900.79 2303.21,3892 2259,3892 v1(2257.95,3893.05) ; R12.2@3814,4584.16 R12.2 3814,4717.3 Motor1.5
  Bottom Layer w15: v1(2257.95,3893.05) 2263.59,3898.7 2281.7,3898.7 2513,4130 3490,4130 3510,4150 3510,4470 3760,4720 3816.7,4720 Motor1.5
Motor1ChB: ESP32.4 LS2.3 | length 651.8
  Top Layer w15: ESP32.4 1464.25,3520 1820,3520 1830.41,3530.41 LS2.3
Motor1ChB_5V: LS2.12 Motor1.6 R13.2 | length 2764.9
  Top Layer w15: LS2.12 1830.41,3968.21 1845.2,3983 2252,3983 v1(2258,3977) ; R13.2@3718,4583.16 3718,4700.04 Motor1.6
  Bottom Layer w10: Motor1.6@3777.03,4759.07 Motor1.6
  Bottom Layer w15: v1(2258,3977) 2441,4160 3470,4160 3480,4170 3480,4490 3749.07,4759.07 Motor1.6@3777.03,4759.07
Motor2ChA: ESP32.27 LS2.4 | length 2288
  Top Layer w15: LS2.4 1856.02,3528.77 1865.79,3519 2096.08,3519 2335.84,3758.76 2546.76,3758.76 2588,3800 v1(2588,3803)
  Bottom Layer w15: ESP32.27 2367.95,2623.7 2392.7,2623.7 2589,2820 2589,3802 v1(2588,3803)
Motor2ChA_5V: LS2.11 Motor2.5 R14.2 | length 2720.3
  Top Layer w10: R14.2@3828,4101.69 R14.2@3829,4102.69
  Top Layer w15: LS2.11 1856.02,3940.23 1873.79,3958 2175.21,3958 2184,3949.21 2184,3800.79 2192.79,3792 v1(2258,3792) ; R14.2@3828,4101.69 3811.79,4101.69 3800.66,4112.81 3800.66,4273.02 Motor2.5
  Bottom Layer w15: v1(2258,3792) 2536,4070 3597.64,4070 Motor2.5
Motor2ChB: ESP32.28 LS2.5 | length 2043.9
  Top Layer w15: LS2.5 1881.59,3553.79 1890.38,3545 2086.72,3545 2343.72,3802 v1(2513,3802)
  Bottom Layer w15: ESP32.28 2564,2919.75 2564,3751 v1(2513,3802)
Motor2ChB_5V: LS2.10 Motor2.6 R15.2 | length 2582.4
  Top Layer w15: LS2.10 1881.61,3920.96 1893.04,3932.4 2059.21,3932.4 2068,3923.61 2068,3848.79 2076.79,3840 v1(2125,3840) ; Motor2.6 3775.66,4326.76 3775.66,4040.34 3806.16,4009.84 R15.2
  Bottom Layer w15: v1(2125,3840) 2126,3841 2266,3841 2525,4100 3548.9,4100 Motor2.6
MuxCOM: ESP32.12 Mux.3 | length 2842.5
  Top Layer w20: ESP32.12 ESP32.12@1364.61,2602.17 ; v1(1958,2550) 1964.88,2550 2073.88,2441 v1(2080,2441) ; v1(3031.5,2106.3) 3094.58,2106.3 3106.3,2118.01 3106.3,2298.28 3094.58,2310 Mux.3
  Bottom Layer w20: ESP32.12 1416.77,2550 v1(1958,2550) ; v1(2080,2441) 2148,2373 2148,1826.99 2223.02,1751.97 2528.85,1751.97 2670.59,1893.7 2732.99,1893.7 2945.59,2106.3 v1(3031.5,2106.3)
MuxInputA: ESP32.31 Mux.11 | length 2477.2
  Top Layer w20: v1(2240.71,3011.26) ESP32.31 ; v1(2749,2429) 2749,2433.28 2775.72,2460 Mux.11
  Bottom Layer w20: v1(2240.71,3011.26) 2199,2969.55 2199,2889 2212,2876 2212,1847.84 2243.38,1816.46 2508.49,1816.46 2646.28,1954.25 2708.69,1954.25 2757,2002.56 2757,2402.28 2754.74,2404.54 2754.74,2423.26 v1(2749,2429)
MuxInputB: ESP32.30 Mux.10 | length 2352.2
  Top Layer w20: v1(2246.79,2910.69) 2247.08,2910.97 2355.23,2910.97 ESP32.30 ; v1(2749,2511) 2750,2510 Mux.10
  Bottom Layer w20: v1(2246.79,2910.69) 2244.09,2907.99 2244.09,1858.17 2255.81,1846.46 2496.06,1846.46 2633.86,1984.25 2696.26,1984.25 2718.03,2006.02 2718.03,2396.33 2703.03,2411.33 2703.03,2495.76 2714.75,2507.47 2745.47,2507.47 v1(2749,2511)
MuxInputC: ESP32.13 Mux.9 | length 2938.7
  Top Layer w20: v1(2748.03,2594.49) 2748.03,2591.2 2779.23,2560 Mux.9
  Bottom Layer w20: ESP32.13 1583.29,2511.26 1589.55,2505 2166.28,2505 2178,2493.28 2178,1839.41 2230.96,1786.46 2520.92,1786.46 2658.71,1924.25 2721.11,1924.25 2794,1997.14 2794,2545.23 2748.03,2591.2 v1(2748.03,2594.49)
Net12V_1: 12V.1 ?.1 S1.1A | length 1870
  Top Layer w110: 3325.58,4586.61 ?.1@3576.98,4838.01
  Top Layer w140: 12V.1 2147.09,4586.61 3325.58,4586.61
  Top Layer w250: S1.1A@1833.86,4742.36 12V.1@1991.34,4742.36
NetC1_2: C1.2 C5.1 C7.1 C9.1 C12.1 C13.1 C18.2 MotorDriver1.16 MotorDriver2.16 S1.1 SBC.3 SBC.5 | length 6696
  Top Layer w20: 2770,3840 C12.1@2840,3840 ; MotorDriver1.16 3030,3490 ; 3457.01,2591 3458.01,2590 3465.07,2590 C5.1 ; SBC.5 3465.07,2571.22 ; SBC.3 3503.41,2430.93 3579.07,2430.93 v1(3580,2430) ; C13.1 3696.82,3850 ; MotorDriver2.16 3853.25,3491.05 3853.6,3491.4
  Top Layer w30: C18.2 3378.47,2706.55 3421.17,2706.55 3465.07,2662.64 ; C1.2 3442.01,2606 3457.01,2591 ; 3458.01,2590 3465.07,2582.93 3465.07,2571.22 ; 3465.07,2590 3465.07,2662.64 ; 3465.07,2765.07 3465.07,2662.64
  Top Layer w40: 2770,3720 2770,3674.88 2814.88,3630 3000,3630 3030,3600 3030,3490 ; 3465.12,2774.88 3520,2720 v1(3520,2717.34) ; 3696.82,3767.74 3853.6,3610.97 3853.6,3491.4
  Top Layer w60: 2770,3960 3049.69,3960 3051.18,3958.5 C7.1@3051.18,3937.01 ; C9.1@3444.88,3937.01 3444.88,3958.28 3446.38,3959.78 3696.82,3959.78 ; 3465.12,2774.88 3465.12,2829.8 3500.27,2864.95 3566.66,2864.95 v3(3572.46,2870.75)
  Top Layer w80: 2770,3720 2770,3840 2770,3960 2770,4350 ; 3314.01,4350 3696.82,3967.19 3696.82,3959.78 3696.82,3850 3696.82,3767.74 3696.82,3763.75 3637.8,3704.72 v3(3633.86,3704.72)
  Top Layer w250: S1.1 1945.63,4350 2770,4350 3314.01,4350
  Bottom Layer w20: v1(3520,2717.34) 3522.66,2717.34 3580,2660 v1(3580,2430)
  Bottom Layer w80: v3(3572.46,2870.75) 3568.67,2870.75 3511.81,2927.61 3511.81,3582.68 v3(3633.86,3704.72)
NetC2_1: C2.1 SBC.6 | length 233.5
  Top Layer w20: C2.1 3240.04,2454.45 3240.04,2479.04 3291.29,2530.29 SBC.6
NetC2_2: C2.2 L1.1 SBC.2 | length 586.5
  Top Layer w20: L1.1@3240,2165.43 L1.1 ; C2.2 3240,2340 3453.36,2340 3465.07,2351.72 SBC.2
  Top Layer w40: L1.1@3240,2165.43 3240,2340
NetC3_2: C3.2 C4.2 C15.1 C17.1 ESP32.19 L1.2 LS1.19 LS2.14 Motor1.3 Motor2.3 R2.1 R5.1 R6.2 R12.1 R13.1 R14.1 R15.1 | length 15499.5
  Top Layer w15: C15.1 1679.38,2063.2 1683.59,2067.41 LS1.19 ; 1680,3950 1696,3934 C17.1 ; 1762.56,3950 1764,3950 1779.23,3934.77 LS2.14 ; R5.1 2920,2679.51 2921.85,2677.66 2991.93,2677.66 v2(2996.88,2672.7) ; R13.1@3718,4542.84 3718,4514 3725,4507 ; R6.2 4146.97,2693.03 4150,2690 ; 3805.21,4507 3814,4515.79 R12.1@3814,4543.84 ; R15.1 3850.21,4050.16 3859,4058.94 3859,4132.57 3850.21,4141.36 3828.64,4141.36 3828,4142 3828,4244.22 3836.79,4253.01 4007.16,4253.01 4015.95,4261.79 Motor2.3
  Top Layer w20: v1(1538,2071) 1546.12,2071 1553.91,2063.2 C15.1 ; v1(1599,3950) 1680,3950 1762.56,3950 ; L1.2 3480,2140 3538.28,2140 3550,2128.28 3550,2051.75 3561.72,2040.04 C3.2 ; C3.2@3627,2040.08 3847.28,2040.08 3859,2051.79 3859,2301 ; R2.1 3830,2330 3859,2301 ; v1(3897.64,4559.06) v1@3899.06,4559.06 ; 3958,4390.29 4015.95,4332.34 Motor2.3 ; Motor1.3@4018.08,4755.38 Motor1.3 ; v2(4230,2660) 4230,2770 ; v2(4290,4570) 4290,4530 v1(4290,2830) 4230,2770 ; 3859,2301 3859,2399 4150,2690 4230,2770
  Top Layer w30: 3725,4507 3805.21,4507 3845.58,4507 v1(3897.64,4559.06) ; v1@3899.06,4559.06 3958,4618 ; 3958,4390.29 3958,4618 ; Motor1.3@4018.08,4755.38 3990,4727.3 3990,4650 3958,4618
  Bottom Layer w15: v2(2996.88,2672.7) 3006.35,2672.7 3018.69,2660.37 3024.32,2660.37 3037.84,2646.85 3037.92,2646.85 3127,2557.77 3127,2008.79 3135.79,2000 3860,2000 3890,2030 3890,2651.21 3898.79,2660 v2(4230,2660)
  Bottom Layer w20: v1(1538,2071) 1532.26,2065.26 1509.51,2065.26 ESP32.19 ; v1(1599,3950) 1430,3781 1430,3472.98 1418.28,3461.26 1225.72,3461.26 1214,3449.54 1214,2052.77 ESP32.19 ; v1(3897.64,4559.06) 3897.64,4625.98 3921.65,4650 4270,4650 4290,4630 v2(4290,4570) ; v1(4290,2830) 4290,1935.67 3964.57,1610.24 1569.76,1610.24 1355.51,1824.49 ESP32.19
NetC6_2: C6.2 MotorDriver1.17 | length 150
  Top Layer w20: MotorDriver1.17 2980,3490
  Top Layer w30: 2980,3490 C6.2
NetC8_2: C8.2 MotorDriver2.17 | length 152.5
  Top Layer w20: MotorDriver2.17 3803.25,3485.7 3803.78,3486.22 ; C8.2@3803.25,3561 C8.2
  Top Layer w30: 3803.78,3486.22 C8.2
NetC10_1: C10.1 Motor1.2 MotorDriver1.15 | length 2297.1
  Top Layer w20: MotorDriver1.15 3080,3490
  Top Layer w30: v3(4041.66,4502.13) 4042.18,4502.65 4042.18,4599.2 C10.1@4043.2,4600.22 ; C10.1@4043.5,4599.08 4043.5,4665.87 4096.82,4719.19 Motor1.2
  Top Layer w35: 3080,3490 3080,3580 3144,3644 v3(3158,3644)
  Bottom Layer w30: v3(3158,3644) 3159,3643 3323,3643 3610,3930 3980,3930 4250,4200 4250,4341.1 4104.73,4486.38 4054.57,4486.38 v3@4042.47,4498.48
NetC10_2: C10.2 Motor1.1 MotorDriver1.7 | length 2957.1
  Top Layer w20: MotorDriver1.7 3130,2828.31 3169.29,2789.02 v3(3169.29,2775.59)
  Top Layer w30: C10.2 4164.38,4681.53 4175.56,4692.71 Motor1.1 ; C10.2@4164.74,4602.74 4164.74,4549.21 4199.19,4514.75 v3(4199.19,4503.66)
  Bottom Layer w30: v3(3169.29,2775.59) 3181.1,2763.78 3326.77,2763.78 3384,2821.01 3384,3644 3620,3880 4000,3880 4305.63,4185.63 4305.63,4342.04 4211.01,4436.66 4211.01,4488.99 v3@4200,4500
NetC11_1: C11.1 Motor2.2 MotorDriver2.15 | length 1084.6
  Top Layer w20: MotorDriver2.15 3903.25,3493.81 3903.6,3494.15
  Top Layer w40: 3903.6,3494.15 3903.6,4155.85 3927.03,4179.29 C11.1 4071.25,4179.29 4094.69,4202.72 Motor2.2
NetC11_2: C11.2 Motor2.1 MotorDriver2.7 | length 2189.9
  Top Layer w20: 3953.25,2803.25 MotorDriver2.7
  Top Layer w30: 4144.78,4090 4173.68,4118.9 C11.2 ; Motor2.1@4172.83,4330.23 Motor2.1 C11.2@4173.43,4180.58
  Top Layer w40: 3953.25,2803.25 3953.25,2794.97 3976.69,2771.54 4157.12,2771.54 4230,2844.42 4230,3716.57 4206.57,3740 4047.05,3740 4023.62,3763.43 4023.62,4066.57 4047.05,4090 4144.78,4090
NetESP32_7: ESP32.7 MPU6050.6 R3.1 | length 2242.8
  Top Layer w15: R3.1 2471.5,2061.96 2471.99,2062.45
  Top Layer w20: ESP32.7 1360.47,3106.3 1744.19,3106.3 1755.91,3094.58 v1(1755.91,3051.18) ; v1(2110.01,2669.87) 2210.03,2669.87 2221.74,2658.16 2221.74,2380.62 2241.1,2361.26 2404.88,2361.26 2433.07,2333.07 ; 2471.39,2063.05 2471.39,2088.22 2433.07,2126.54 2433.07,2333.07 ; MPU6050.6 2433.07,2333.07
  Bottom Layer w20: v1(1755.91,3051.18) 1755.91,3004.82 2085.11,2675.61 2104.26,2675.61 v1(2110.01,2669.87)
NetESP32_8: ESP32.8 MPU6050.5 R4.1 | length 2479.7
  Top Layer w15: ESP32.8 1366.77,3000 1843,3000 v1(1845,2998) ; R4.1 2471.49,2201.73 ; 2471.49,2263.78 2492.36,2284.64 2512.99,2284.64 v1(2519.68,2291.34)
  Top Layer w20: 2471.49,2201.73 2471.49,2263.78 2471.49,2325.83 2595.67,2450 MPU6050.5
  Bottom Layer w15: v1(1845,2998) 2170.02,2998 2180.81,3008.79 2180.81,3044.97 2189.59,3053.76 2275.88,3053.76 2289.29,3040.35 2289.29,2469.42 2298.08,2460.63 2405.51,2460.63 2405.51,2464.57 2444.88,2503.94 2510.9,2503.94 2519.68,2495.15 v1(2519.68,2291.34)
NetR1_2: R1.2 R2.2 SBC.4 | length 387.6
  Top Layer w20: SBC.4 3689.71,2530.29 R1.2 R2.2
Temp1: Mux.15 R7.1 Temp1.1 | length 1105.1
  Top Layer w10: R7.1 2452.56,1672.28 2903.59,1672.28 2909.45,1678.14 2909.45,1749.45 Temp1.1 2910,2254.14 2904.14,2260 Mux.15
Temp2: Mux.14 R8.2 Temp2.1 | length 2204.4
  Top Layer w10: R8.2 2287.44,1671.4 2287.44,1653.35 2292.86,1647.93 3320.81,1647.93 3336.85,1663.97 Temp2.1 3336.85,1914.14 3330.99,1920 2935.86,1920 2930,1925.86 2930,2304.14 2924.14,2310 Mux.14
Temp3: Mux.13 R9.2 Temp3.1 | length 3309.6
  Top Layer w10: R9.2 2129.92,1637.8 2139.78,1627.93 3750.81,1627.93 3766.85,1643.97 3766.85,1750 3766.85,1934.14 3760.99,1940 2955.86,1940 2950,1945.86 2950,2354.14 2944.14,2360 Mux.13
Temp4: Mux.12 R10.2 Temp4.1 | length 4628
  Top Layer w10: R10.2 1921.26,1618.11 1931.44,1607.93 4007.59,1607.93 4023.62,1623.97 4023.62,1990.21 4029.48,1996.06 4137.8,1996.06 4146.29,2004.56 Temp4.1 3947.02,2097.02 3940,2090 3940,1970 3939.14,1969.14 3939.14,1965.86 3933.28,1960 2975.86,1960 2970,1965.86 2970,2404.14 2964.14,2410 Mux.12
Temp5: Mux.1 R11.2 Temp5.1 | length 5423.8
  Top Layer w10: R11.2 1736.22,1598.43 1746.71,1587.93 4034.83,1587.93 4051.18,1604.28 4051.18,1966.58 4057.04,1972.44 4222.49,1972.44 4228.35,1978.3 4228.35,2517.99 4222.49,2523.84 Temp5.1 4053.84,2523.84 3910,2380 3910,1985.86 3904.14,1980 3001.92,1980 2991.5,1990.42 2991.5,2137.17 3040,2185.67 Mux.1
pads on no net: ESP32.2 ESP32.16 ESP32.17 ESP32.18 ESP32.20 ESP32.21 ESP32.22 ESP32.23 ESP32.24 ESP32.25 ESP32.29 ESP32.32 ESP32.34 ESP32.35 ESP32.38 J1. J2. J3. J4. LS2.6 LS2.9 MotorDriver1.4 MotorDriver1.5 MotorDriver1.6 MotorDriver1.8 MotorDriver1.14 MotorDriver1.20 MotorDriver2.4 MotorDriver2.5 MotorDriver2.6 MotorDriver2.8 MotorDriver2.14 MotorDriver2.20 MPU6050.1 MPU6050.2 MPU6050.3 MPU6050.4 Mux.2 Mux.4 Mux.5

## Polygon pours and split planes (outlines as drawn)
GND on Bottom Layer "GND_L02_P000" (solid, pour order 0): 1185.04,1560 1185.04,4910 3570,4910 3569.16,4910.1 4335.63,4910.1 4335.63,1560.04 4335.59,1560

## Keep-outs
Keep-Out Layer:
  lines w10: 3569.16,4910.1 4335.63,4910.1 4335.63,4378.94 4335.63,3790.91 4335.63,1560.04 4335.59,1560 4294.33,1560 4024.57,1560 1530.55,1560 1185.04,1560 1185.04,4910 3260,4910 3570,4910

## Other copper
Top Layer:
  text "E2306" at 1958.82,4061.18 h60

## Silkscreen, mask and mechanical layers (free items; w line width, h text height)
Top Overlay:
  text "JLCJLCJLCJLC" at 1506,3268 h60